# Altium PCB bootleg-1.PcbDoc (part 2 of 2)
Units mm, origin at the board's own origin, x right, y up, seen from the top; angles counter-clockwise.
Board outline 284.8 x 94.3 mm, 2 copper layers (Component Side, Bottom Layer), stack 1.571 mm thick; 153 components, 101 nets, 742 pads, 48 vias.
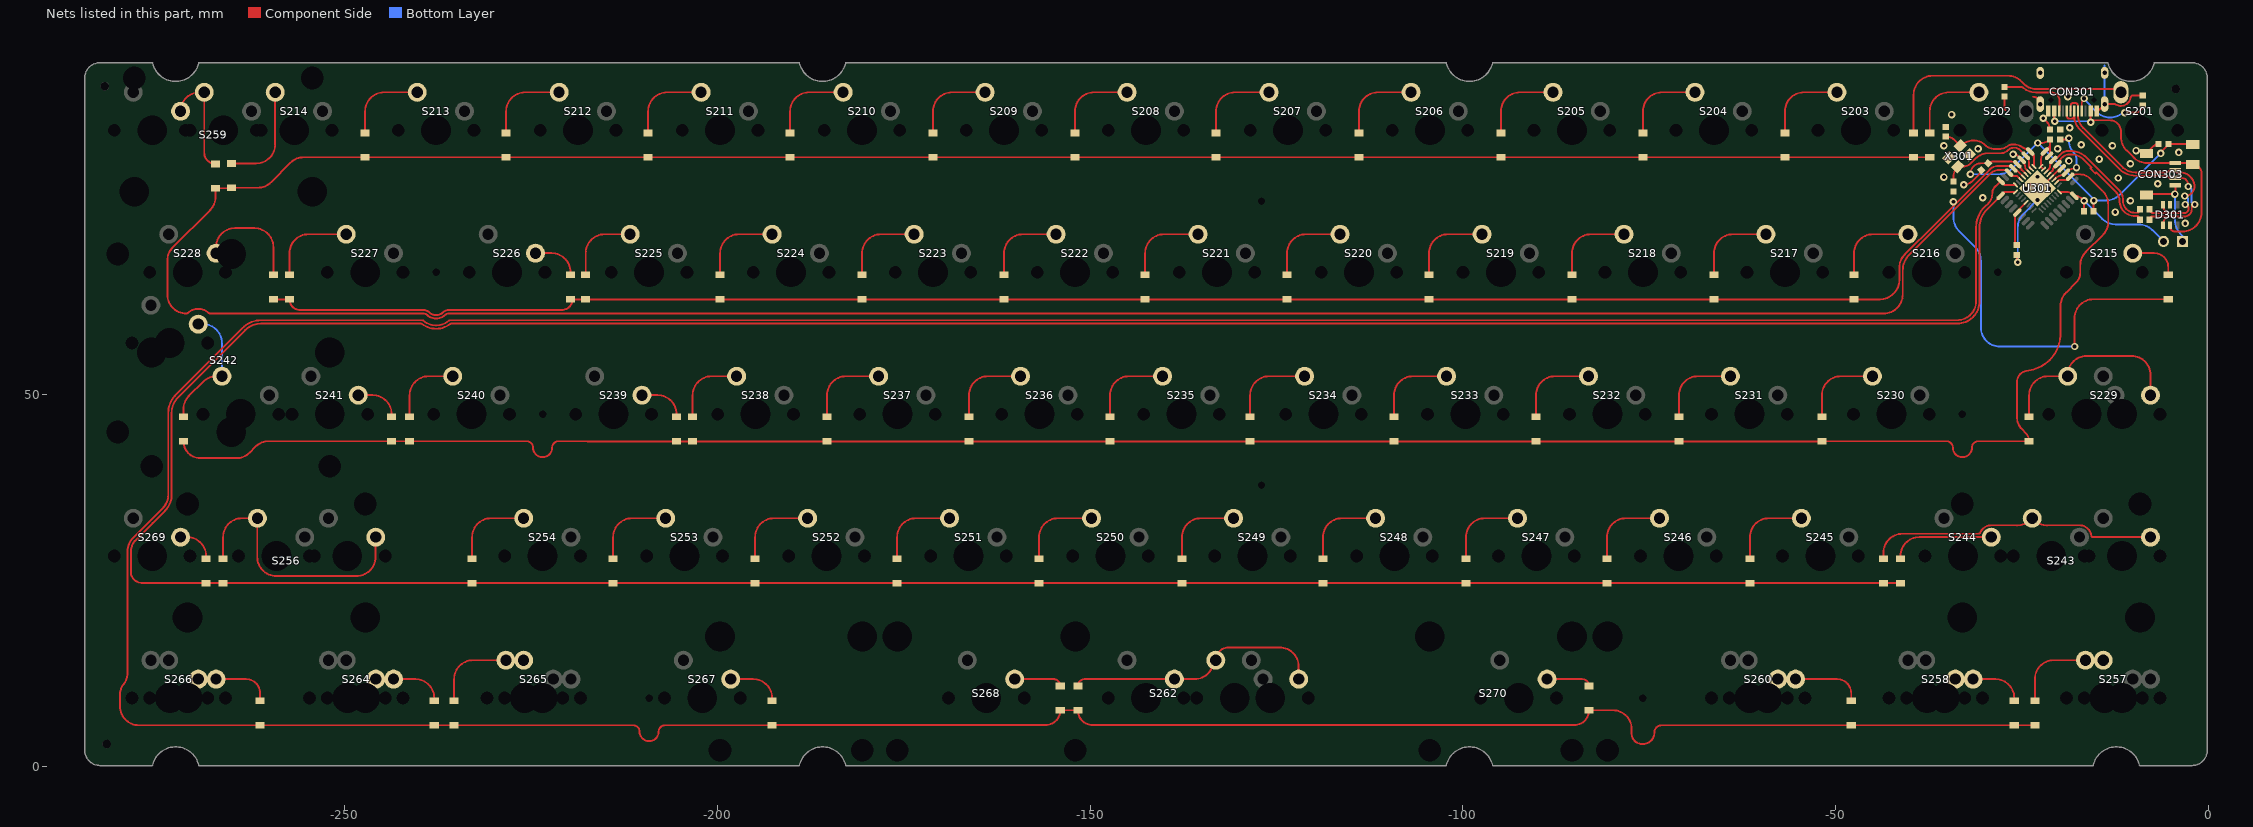
[diagram p2: the nets of this part, all layers, seen from the top]

## Via types
v1: diameter 1, hole 0.5, Component Side to Bottom Layer, tented both sides, 43 vias
v2: diameter 1, hole 0.5, Component Side to Bottom Layer, tented bottom, 5 vias

## Nets (pads, with @x,y where several pads share a name; then routed paths per layer and width w, separated by ;. In a path a pad name is that pad's centre, name@x,y a point inside that pad or via, vN(x,y) a via of type N, cw(c..) or ccw(c..) an arc to the next point about the centre after c; other vN are vias at no path point) (continued)
D_N: CON301.A7 CON301.B7 CON303.2 D301.3 R305.2 | length 34.6
  Component Side w0.254: CON301.A7@-18.45,88 ccw(c-18.681,88.106) -18.427,88.107 -18.427,88.725 cw(c-18.1,88.725) -18.1,89.052 -17.8,89.052 cw(c-17.8,88.725) -17.473,88.725 -17.473,88.106 ccw(c-17.219,88.106) CON301.B7@-17.45,88 ; CON301.B7@-17.45,87.381 ccw(c-15.108,87.381) -16.765,85.726 ccw(c-15.108,87.381) -16.764,85.725 -11.539,80.5 ccw(c-9.743,82.296) -9.743,79.756 -5.721,79.756 ccw(c-5.721,80.575) -5.142,79.996 -4.511,79.996 cw(c-4.511,79.725) -4.24,79.725 -3.702,79.725 cw(c-3.702,77.851) -1.829,77.851 cw(c-3.099,77.851) -3.099,76.581 v1(-3.137,76.581) v1@-3.175,76.581 ; R305.2@-7.859,74.803 ccw(c-7.351,74.803) -7.351,74.295 -5.084,74.295 ; D301.3@-6.03,75.241 ccw(c-5.084,75.241) -5.084,74.295 ; v1(-3.048,75.438) cw(c-3.048,75.032) -2.642,75.032 -2.642,74.803 cw(c-3.15,74.803) -3.15,74.295 -5.084,74.295
  Bottom Layer w0.254: v1(-3.137,76.581) cw(c-3.137,76.111) -2.667,76.111 v1@-2.667,75.692
D_P: CON301.A6 CON301.B6 CON303.3 D301.4 R306.2 | length 34.9
  Component Side w0.254: CON301.B6@-18.927,88.118 cw(c-18.669,88.229) CON301.B6@-18.931,88.128 ; R306.2@-7.859,73.406 cw(c-7.427,73.406) -7.427,73.838 -3.15,73.838 ccw(c-3.15,74.803) -2.184,74.803 -2.184,75.032 cw(c-1.778,75.032) v1(-1.778,75.438) ; D301.4@-6.03,72.841 cw(c-5.042,72.841) -5.042,73.829 -4.953,73.829 ; CON303.3@-4.511,78.996 -5.142,78.996 ccw(c-5.873,78.265) -5.873,79.299 -9.743,79.299 cw(c-9.743,82.296) -11.862,80.177 -17.206,85.52 cw(c-15.41,87.317) -17.95,87.317 CON301.A6@-17.95,88 ccw(c-17.719,87.894) -17.973,87.894 -17.973,87.275 cw(c-18.3,87.275) -18.3,86.948 -18.6,86.948 cw(c-18.6,87.275) -18.927,87.275 -18.927,88.081 ccw(c-19.181,88.082) CON301.B6@-18.931,88.128 ; CON303.3@-4.38,79.008 -3.621,79.008 cw(c-3.621,77.659) -3.043,78.878 cw(c-3.95,77.971) -2.667,77.971 v1(-2.667,77.851) ; CON301.B6@-18.931,88.128 ccw(c-19.181,88.082) -18.936,88.148 -18.941,88.169 cw(c-18.696,88.235) -18.95,88.229 ccw(c-18.669,88.229) CON301.B6@-18.931,88.128
  Bottom Layer w0.254: v1(-2.667,77.851) cw(c-2.667,77.394) -2.21,77.394 -2.21,75.692
D_PRE_N: R305.1 U301.30 | length 18.3
  Component Side w0.254: U301.30@-21.719,79.828 -21.336,80.211 ccw(c-21.644,80.518) -21.209,80.518 cw(c-20.107,80.518) -20.886,81.297 U301.30@-20.765,81.419 ccw(c-20.765,81.994) -20.358,81.587 -19.667,82.278 ; -19.665,82.276 cw(c-18.819,81.43) -18.819,82.626 -18.451,82.626 cw(c-18.451,79.629) -16.332,81.748 -11.906,77.323 cw(c-13.055,76.173) -11.43,76.173 -11.43,75.984 ccw(c-9.779,75.984) -9.779,74.333 -9.449,74.333 ccw(c-9.449,74.496) -9.286,74.496 cw(c-8.852,74.496) R305.1@-9.159,74.803
D_PRE_P: R306.1 U301.29 | length 18.2
  Component Side w0.254: U301.29@-21.366,79.474 -20.887,79.953 ccw(c-21.06,80.125) -20.816,80.125 cw(c-20.548,80.125) -20.738,80.314 U301.29@-20.199,80.853 cw(c-19.614,80.853) -20.028,81.267 -19.476,81.819 cw(c-18.63,80.973) -18.63,82.169 -18.451,82.169 cw(c-18.451,79.629) -16.655,81.425 -16.318,81.088 -15.643,80.413 -15.784,80.273 -15.109,79.598 -14.969,79.739 -13.843,78.613 -12.363,77.133 ; -12.362,77.132 cw(c-13.512,75.984) -11.887,75.984 ccw(c-9.779,75.984) -9.779,73.876 -9.449,73.876 cw(c-9.449,73.713) -9.286,73.713 ccw(c-8.852,73.713) R306.1@-9.159,73.406
GND: C301.1 C302.1 C303.1 C304.1 C305.1 C306.1 CON301.A1B12 CON301.B1A12 CON301.S1 CON302.1 CON303.4 CON303.5 D301.2 R302.2 R303.2 R304.2 U301.3 U301.28 X301.2 X301.4 | length 51.7
  Component Side w0.254: v1(-32.766,78.105) ccw(c-32.766,79.702) -31.637,78.573 -30.432,79.778 C302.1@-30.432,80.058 ; R303.2@-27.305,89.901 -27.305,88.265 ccw(c-27.178,88.265) -27.178,88.138 ; v1(-26.162,82.169) -25.758,82.169 U301.3@-25.007,81.419 -24.961,81.372 cw(c-26.047,80.286) -24.769,81.139 cw(c-26.047,80.286) -24.671,80.968 cw(c-26.047,80.286) -24.511,80.286 U301.3@-24.053,79.828 ; R302.2@-25.654,68.692 -25.654,67.998 ccw(c-25.22,67.998) v1(-25.527,67.691) ; -23.506,89.901 cw(c-23.506,88.915) CON301.S1@-22.52,88.915 ; v2(-22.886,77.6) -22.533,77.6 -19.845,80.287 U301.28@-19.633,80.287 ; v1(-22.098,86.995) -21.647,86.544 cw(c-22.706,85.486) C303.1@-21.209,85.486 ; CON301.A1B12@-14.95,88 ccw(c-14.95,88.374) -14.685,88.11 CON301.S1@-13.88,88.915 -12.54,88.915 cw(c-12.539,88.661) -12.402,88.875 ccw(c-11.69,89.995) -10.384,89.761 ccw(c-11.69,89.995) -10.375,89.818 cw(c-10.123,89.784) -10.34,89.917 cw(c-10.087,89.761) -10.087,90.058 R304.2@-8.763,90.058 ; CON303.5@-8.255,82.308 -7.264,83.299 cw(c-6.619,82.653) C304.1@-6.619,83.566 ; CON303.5@-7.948,76.835 v1(-4.445,76.835) ccw(c-4.602,76.992) -4.38,76.992 CON303.4@-4.38,78.008 ; v1@-6.858,77.925 ccw(c-7.165,78.232) v1(-6.731,78.232)
  Bottom Layer w0.254: v1(-25.527,67.691) -25.527,72.352 ; -25.527,72.39 -25.527,72.352 ; v2(-22.886,76.045) -24.783,74.148 ccw(c-22.987,72.352) -25.527,72.352 ; CON301.S1@-13.88,89.915 CON301.S1@-13.88,93.095 -13.88,94.095 ; v1(-4.445,76.835) -4.445,73.315 ccw(c-1.905,73.315) -3.701,71.519 CON302.1@-3.048,70.866
  other v1: -3.048,72.898 -12.446,74.422 -10.414,75.946 -30.226,76.327 -12.065,78.994 -35.433,79.121 -10.414,80.899 -18.669,81.28 -14.605,81.534 -3.937,82.423 -9.652,82.677 -30.861,82.931 -20.193,82.931 -35.433,83.312 -12.827,83.312 -17.018,83.439 -18.542,85.725 -34.417,87.503 -18.796,89.916
  other v2: -24.442,77.6 -21.33,77.6 -22.886,79.156
NetC301_2: C301.2 U301.27 | length 8.8
  Component Side w0.254: U301.27@-20.659,78.767 -20.501,78.925 cw(c-19.414,77.839) -19.414,79.375 U301.27@-19.068,79.722 cw(c-17.608,78.262) v1@-17.608,80.326 ; C301.2@-19.812,84.186 -18.796,84.186 v1@-18.796,84.201
  Bottom Layer w0.254: v1(-18.669,84.328) -18.669,83.956 ccw(c-16.501,83.956) -18.034,82.423 cw(c-18.954,81.503) -18.016,82.405 cw(c-18.954,81.503) -17.653,81.503 v1(-17.653,80.391)
NetC305_2: C305.2 U301.2 X301.3 | length 14.8
  Component Side w0.254: C305.2@-34.163,78.501 -34.163,79.123 cw(c-32.165,79.123) X301.3@-33.578,80.536 ; X301.3@-33.983,80.572 X301.3@-33.798,80.756 ; X301.3@-33.578,80.536 -32.818,80.536 ccw(c-32.818,81.867) -31.877,80.926 -31.226,81.577 cw(c-29.43,79.781) -29.43,82.321 -27.839,82.321 ccw(c-27.839,83.795) -26.797,82.753 cw(c-26.06,82.016) -26.06,83.058 cw(c-26.06,81.743) -25.13,82.673 U301.2@-24.442,81.984 cw(c-25.484,80.942) -24.01,80.942 -24.01,80.492 U301.2@-23.699,80.181
NetC306_2: C306.2 U301.1 X301.1 | length 16.3
  Component Side w0.254: C306.2@-35.179,84.567 cw(c-35.179,82.921) -34.015,84.085 X301.1@-33.224,83.294 cw(c-31.49,81.56) -31.49,84.012 -31.329,84.012 cw(c-31.329,82.056) -29.945,83.439 ccw(c-28.612,84.772) -29.944,83.438 ccw(c-28.612,84.772) -28.612,82.887 -28.023,82.887 ccw(c-28.023,84.621) -27.299,83.045 -27.095,83.156 -26.775,83.33 cw(c-26.06,82.016) -26.06,83.512 cw(c-26.06,81.743) -25.196,83.286 U301.1@-23.876,82.55 ; U301.1@-23.346,80.535 -23.346,81.27 ; U301.1@-23.876,82.55 cw(c-25.156,81.27) -23.346,81.27 ; U301.1@-23.876,82.55 -23.346,82.02 -23.346,81.27
NetCON301_A5: CON301.A5 R304.1 | length 11.8
  Component Side w0.254: CON301.A5@-16.95,88 -16.95,88.968 cw(c-16.256,88.968) v1@-16.256,89.662 ; v1(-11.176,87.757) -9.764,87.757 ccw(c-9.764,88.758) R304.1@-8.763,88.758
  Bottom Layer w0.254: v1(-16.637,89.662) -16.637,89.535 -14.968,87.866 ccw(c-13.172,89.662) -14.848,87.753 ccw(c-13.172,89.662) -13.172,87.122 -13.117,87.122 ccw(c-13.117,89.662) -11.321,87.866 -11.285,87.866 v1(-11.176,87.757)
NetCON301_B5: CON301.B5 R303.1 | length 9.6
  Component Side w0.254: R303.1@-27.305,91.201 -25.013,91.201 cw(c-25.012,90.947) -24.843,91.137 ccw(c-23.105,93.1) -23.115,90.478 -23.105,90.478 -21.003,90.478 cw(c-21.009,89.408) -19.939,89.408 -19.939,88 CON301.B5@-19.95,88
NetD201_1: D201.1 S201.1 | length 35.2
  Component Side w0.254: D201.1@-39.497,85.05 -39.497,90.177 cw(c-36.957,90.177) -36.957,92.717 -26.84,92.717 cw(c-26.84,90.177) -25.044,91.973 -24.638,91.567 ccw(c-23.105,93.1) -23.105,90.932 -12.127,90.932 cw(c-12.127,90.495) S201.1@-11.69,90.495
NetD202_1: D202.1 S202.1 | length 11
  Component Side w0.254: D202.1@-37.338,85.05 -37.338,87.955 cw(c-34.798,87.955) -34.798,90.495 S202.1@-30.74,90.495
NetD203_1: D203.1 S203.1 | length 11.3
  Component Side w0.254: D203.1@-56.769,85.05 -56.769,87.955 cw(c-54.229,87.955) -54.229,90.495 S203.1@-49.79,90.495
NetD204_1: D204.1 S204.1 | length 11.3
  Component Side w0.254: D204.1@-75.819,85.05 -75.819,87.955 cw(c-73.279,87.955) -73.279,90.495 S204.1@-68.84,90.495
NetD205_1: D205.1 S205.1 | length 11.3
  Component Side w0.254: D205.1@-94.869,85.05 -94.869,87.955 cw(c-92.329,87.955) -92.329,90.495 S205.1@-87.89,90.495
NetD206_1: D206.1 S206.1 | length 11.3
  Component Side w0.254: D206.1@-113.919,85.05 -113.919,87.955 cw(c-111.379,87.955) -111.379,90.495 S206.1@-106.94,90.495
NetD207_1: D207.1 S207.1 | length 11.5
  Component Side w0.254: D207.1@-133.096,85.05 -133.096,87.955 cw(c-130.556,87.955) -130.556,90.495 S207.1@-125.99,90.495
NetD208_1: D208.1 S208.1 | length 11.3
  Component Side w0.254: D208.1@-152.019,85.05 -152.019,87.955 cw(c-149.479,87.955) -149.479,90.495 S208.1@-145.04,90.495
NetD209_1: D209.1 S209.1 | length 11.3
  Component Side w0.254: D209.1@-171.069,85.05 -171.069,87.955 cw(c-168.529,87.955) -168.529,90.495 S209.1@-164.09,90.495
NetD210_1: D210.1 S210.1 | length 11.5
  Component Side w0.254: D210.1@-190.246,85.05 -190.246,87.955 cw(c-187.706,87.955) -187.706,90.495 S210.1@-183.14,90.495
NetD211_1: D211.1 S211.1 | length 11.5
  Component Side w0.254: D211.1@-209.296,85.05 -209.296,87.955 cw(c-206.756,87.955) -206.756,90.495 S211.1@-202.19,90.495
NetD212_1: D212.1 S212.1 | length 11.5
  Component Side w0.254: D212.1@-228.346,85.05 -228.346,87.955 cw(c-225.806,87.955) -225.806,90.495 S212.1@-221.24,90.495
NetD213_1: D213.1 S213.1 | length 11.3
  Component Side w0.254: D213.1@-247.269,85.05 -247.269,87.955 cw(c-244.729,87.955) -244.729,90.495 S213.1@-240.29,90.495
NetD214_1: D214.1 S214.1 | length 14.3
  Component Side w0.254: D214.1@-265.176,80.954 -261.88,80.954 ccw(c-261.88,83.494) -259.34,83.494 S214.1@-259.34,90.495
NetD215_1: D215.1 S215.1 | length 6.9
  Component Side w0.254: S215.1@-10.102,68.905 -7.224,68.905 cw(c-7.224,67.015) -5.334,67.015 D215.1@-5.334,66
NetD216_1: D216.1 S216.1 | length 11.6
  Component Side w0.254: D216.1@-47.498,66 -47.498,68.905 cw(c-44.958,68.905) -44.958,71.445 S216.1@-40.265,71.445
NetD217_1: D217.1 S217.1 | length 11.3
  Component Side w0.254: D217.1@-66.294,66 -66.294,68.905 cw(c-63.754,68.905) -63.754,71.445 S217.1@-59.315,71.445
NetD218_1: D218.1 S218.1 | length 11.3
  Component Side w0.254: D218.1@-85.344,66 -85.344,68.905 cw(c-82.804,68.905) -82.804,71.445 S218.1@-78.365,71.445
NetD219_1: D219.1 S219.1 | length 11.5
  Component Side w0.254: D219.1@-104.521,66 -104.521,68.905 cw(c-101.981,68.905) -101.981,71.445 S219.1@-97.415,71.445
NetD220_1: D220.1 S220.1 | length 12.2
  Component Side w0.254: D220.1@-123.571,66 -123.571,68.905 cw(c-121.031,68.905) -121.031,71.445 S220.1@-116.465,71.445 S220.1@-116.967,70.943
NetD221_1: D221.1 S221.1 | length 11.5
  Component Side w0.254: D221.1@-142.621,66 -142.621,68.905 cw(c-140.081,68.905) -140.081,71.445 S221.1@-135.515,71.445
NetD222_1: D222.1 S222.1 | length 11.3
  Component Side w0.254: D222.1@-161.544,66 -161.544,68.905 cw(c-159.004,68.905) -159.004,71.445 S222.1@-154.565,71.445
NetD223_1: D223.1 S223.1 | length 11.3
  Component Side w0.254: D223.1@-180.594,66 -180.594,68.905 cw(c-178.054,68.905) -178.054,71.445 S223.1@-173.615,71.445
NetD224_1: D224.1 S224.1 | length 11.3
  Component Side w0.254: D224.1@-199.644,66 -199.644,68.905 cw(c-197.104,68.905) -197.104,71.445 S224.1@-192.665,71.445
NetD225_1: D225.1 S225.1 | length 10.3
  Component Side w0.254: D225.1@-217.678,66 -217.678,68.905 cw(c-215.138,68.905) -215.138,71.445 S225.1@-211.715,71.445
NetD226_1: D226.1 S226.1 | length 6.5
  Component Side w0.254: S226.1@-224.415,68.905 -222.25,68.905 cw(c-222.25,66.365) -219.71,66.365 D226.1@-219.71,66
NetD227_1: D227.1 S227.1 | length 12.7
  Component Side w0.254: D227.1@-257.429,66 -257.429,68.905 cw(c-254.889,68.905) -254.889,71.445 S227.1@-249.815,71.445 S227.1@-250.317,70.943
NetD228_1: D228.1 S228.1 | length 15.8
  Component Side w0.254: S228.1@-267.277,68.905 -267.277,69.723 cw(c-264.737,69.723) -264.737,72.263 -262.128,72.263 cw(c-262.128,69.723) -259.588,69.723 D228.1@-259.588,66
  Bottom Layer w0.254: S228.1@-267.734,68.448 S228.1@-267.277,68.905
NetD229_1: D229.1 S229.1 | length 26.4
  Component Side w0.254: D229.1@-24.003,46.95 -24.003,49.855 cw(c-21.463,49.855) -21.463,52.395 S229.1@-18.834,52.395 -18.834,52.578 cw(c-16.294,52.578) -16.294,55.118 -10.261,55.118 cw(c-10.261,52.578) -7.721,52.578 S229.1@-7.721,49.855
NetD230_1: D230.1 S230.1 | length 11.1
  Component Side w0.254: D230.1@-51.816,46.95 -51.816,49.855 cw(c-49.276,49.855) -49.276,52.395 S230.1@-45.027,52.395
NetD231_1: D231.1 S231.1 | length 11.3
  Component Side w0.254: D231.1@-70.993,46.95 -70.993,49.855 cw(c-68.453,49.855) -68.453,52.395 S231.1@-64.077,52.395
NetD232_1: D232.1 S232.1 | length 11.4
  Component Side w0.254: D232.1@-90.17,46.95 -90.17,49.855 cw(c-87.63,49.855) -87.63,52.395 S232.1@-83.127,52.395
NetD233_1: D233.1 S233.1 | length 11.4
  Component Side w0.254: D233.1@-109.22,46.95 -109.22,49.855 cw(c-106.68,49.855) -106.68,52.395 S233.1@-102.177,52.395
NetD234_1: D234.1 S234.1 | length 12.5
  Component Side w0.254: D234.1@-128.524,46.95 -128.524,49.855 cw(c-125.984,49.855) -125.984,52.395 S234.1@-121.227,52.395
  Bottom Layer w0.254: S234.1@-121.793,51.83 S234.1@-121.227,52.395
NetD235_1: D235.1 S235.1 | length 11.4
  Component Side w0.254: D235.1@-147.32,46.95 -147.32,49.855 cw(c-144.78,49.855) -144.78,52.395 S235.1@-140.277,52.395
NetD236_1: D236.1 S236.1 | length 11.3
  Component Side w0.254: D236.1@-166.243,46.95 -166.243,49.855 cw(c-163.703,49.855) -163.703,52.395 S236.1@-159.327,52.395
NetD237_1: D237.1 S237.1 | length 11.3
  Component Side w0.254: D237.1@-185.293,46.95 -185.293,49.855 cw(c-182.753,49.855) -182.753,52.395 S237.1@-178.377,52.395
NetD238_1: D238.1 S238.1 | length 10.3
  Component Side w0.254: D238.1@-203.327,46.95 -203.327,49.855 cw(c-200.787,49.855) -200.787,52.395 S238.1@-197.427,52.395
NetD239_1: D239.1 S239.1 | length 6.5
  Component Side w0.254: S239.1@-210.127,49.855 -208.026,49.855 cw(c-208.026,47.315) -205.486,47.315 D239.1@-205.486,46.95
NetD240_1: D240.1 S240.1 | length 10.1
  Component Side w0.254: D240.1@-241.3,46.95 -241.3,49.855 cw(c-238.76,49.855) -238.76,52.395 S240.1@-235.527,52.395
NetD241_1: D241.1 S241.1 | length 6.3
  Component Side w0.254: S241.1@-248.202,49.855 -246.253,49.855 cw(c-246.253,47.315) -243.713,47.315 D241.1@-243.713,46.95
NetD242_1: D242.1 S242.1 | length 17.5
  Component Side w0.254: D242.1@-271.653,46.95 -271.653,47.963 cw(c-269.113,47.963) -270.909,49.759 -269.017,51.651 cw(c-267.221,49.855) -267.221,52.395 S242.1@-266.49,52.395
  Bottom Layer w0.254: S242.1@-269.67,59.385 -269.03,59.385 cw(c-269.03,56.845) -266.49,56.845 S242.1@-266.49,52.395
NetD243_1: D243.1 S243.1 | length 40.1
  Component Side w0.254: D243.1@-43.561,27.9 -43.561,28.719 cw(c-41.021,28.719) -41.021,31.259 -33.782,31.259 -30.793,31.259 ccw(c-30.793,31.513) -30.559,31.416 cw(c-29.083,30.805) -29.238,32.394 ; -29.337,32.385 -29.238,32.394 ; -29.073,32.402 ccw(c-29.083,30.805) -29.238,32.394 ; -29.073,32.402 -25.61,32.385 ; -25.608,32.385 ccw(c-25.608,34.925) -23.812,33.129 S243.1@-23.596,33.345 -23.383,33.132 ccw(c-21.587,34.928) -23.38,33.129 ccw(c-21.587,34.928) -21.587,32.388 ; -21.586,32.388 -17.255,32.402 -17.254,32.402 cw(c-17.246,30.805) -17.035,32.388 ; -17.035,32.388 cw(c-17.246,30.805) -15.664,31.024 ccw(c-15.413,31.059) -15.413,30.805 S243.1@-7.721,30.805
NetD244_1: D244.1 S244.1 | length 14
  Component Side w0.254: D244.1@-41.275,27.9 -41.275,28.265 cw(c-38.735,28.265) -38.735,30.805 S244.1@-29.083,30.805
NetD245_1: D245.1 S245.1 | length 11.3
  Component Side w0.254: D245.1@-61.468,27.9 -61.468,30.805 cw(c-58.928,30.805) -58.928,33.345 S245.1@-54.552,33.345
NetD246_1: D246.1 S246.1 | length 12.4
  Component Side w0.254: D246.1@-80.645,27.9 -80.645,30.805 cw(c-78.105,30.805) -78.105,33.345 S246.1@-73.602,33.345 S246.1@-74.295,32.652
NetD247_1: D247.1 S247.1 | length 11.3
  Component Side w0.254: D247.1@-99.568,27.9 -99.568,30.805 cw(c-97.028,30.805) -97.028,33.345 S247.1@-92.652,33.345
NetD248_1: D248.1 S248.1 | length 11.4
  Component Side w0.254: D248.1@-118.745,27.9 -118.745,30.805 cw(c-116.205,30.805) -116.205,33.345 S248.1@-111.702,33.345
NetD249_1: D249.1 S249.1 | length 11.3
  Component Side w0.254: D249.1@-137.668,27.9 -137.668,30.805 cw(c-135.128,30.805) -135.128,33.345 S249.1@-130.752,33.345
NetD250_1: D250.1 S250.1 | length 11.4
  Component Side w0.254: D250.1@-156.845,27.9 -156.845,30.805 cw(c-154.305,30.805) -154.305,33.345 S250.1@-149.802,33.345
NetD251_1: D251.1 S251.1 | length 11.4
  Component Side w0.254: D251.1@-175.895,27.9 -175.895,30.805 cw(c-173.355,30.805) -173.355,33.345 S251.1@-168.852,33.345
NetD252_1: D252.1 S252.1 | length 11.4
  Component Side w0.254: D252.1@-194.945,27.9 -194.945,30.805 cw(c-192.405,30.805) -192.405,33.345 S252.1@-187.902,33.345
NetD253_1: D253.1 S253.1 | length 11.4
  Component Side w0.254: D253.1@-213.995,27.9 -213.995,30.805 cw(c-211.455,30.805) -211.455,33.345 S253.1@-206.952,33.345
NetD254_1: D254.1 S254.1 | length 11.3
  Component Side w0.254: D254.1@-232.918,27.9 -232.918,30.805 cw(c-230.378,30.805) -230.378,33.345 S254.1@-226.002,33.345
NetD256_1: D256.1 S256.1 | length 36.3
  Component Side w0.254: D256.1@-266.327,27.9 -266.327,30.805 cw(c-263.787,30.805) -263.787,33.345 -261.747,33.345 -261.747,28.14 ccw(c-259.207,28.14) -259.207,25.6 -248.412,25.6 ccw(c-248.412,28.14) -248.061,25.624 ccw(c-248.412,28.14) -245.872,28.14 -245.872,30.805 S256.1@-246.38,30.297
NetD257_1: D257.1 S257.2 | length 11.1
  Component Side w0.254: D257.1@-23.241,8.85 -23.241,11.755 cw(c-20.701,11.755) -20.701,14.295 S257.2@-16.452,14.295
NetD258_1: D258.1 S258.1 | length 9.7
  Component Side w0.254: S258.1@-33.909,11.755 S258.1@-31.528,11.755 -28.54,11.755 cw(c-28.54,9.215) -26,9.215 D258.1@-26,8.85
NetD259_1: D259.1 S259.1 | length 16.1
  Component Side w0.254: S259.1@-272.034,87.955 cw(c-269.494,87.955) -269.494,90.495 S259.1@-268.859,90.495 -268.859,82.407 ccw(c-267.335,82.407) D259.1@-267.335,80.883
  Bottom Layer w0.254: S259.1@-272.04,87.955 S259.1@-271.349,88.646
NetD260_1: D260.1 S260.1 | length 9.6
  Component Side w0.254: S260.1@-55.346,11.755 -49.769,11.755 cw(c-49.769,9.865) -47.879,9.865 D260.1@-47.879,8.85
NetD262_1: D262.1 S262.1 | length 35.8
  Component Side w0.254: D262.1@-151.638,10.85 cw(c-150.733,10.85) -150.733,11.755 S262.1@-138.689,11.755 -135.983,11.755 ccw(c-135.983,14.295) -133.443,14.295 S262.1@-133.443,14.732 ; S262.1@-133.133,14.295 cw(c-131.426,14.295) -131.426,16.002 -124.553,16.002 cw(c-124.553,13.462) -122.013,13.462 S262.1@-122.013,11.755
NetD264_1: D264.1 S264.1 | length 7.3
  Component Side w0.254: S264.1@-243.459,11.755 -240.54,11.755 cw(c-240.54,9.215) -238,9.215 D264.1@-238,8.85
NetD265_1: D265.1 S265.2 | length 11.3
  Component Side w0.254: D265.1@-235.331,8.85 -235.331,11.755 cw(c-232.791,11.755) -232.791,14.295 S265.2@-228.383,14.295
NetD266_1: D266.1 S266.1 | length 8
  Component Side w0.254: S266.1@-267.277,11.755 -263.256,11.755 cw(c-263.256,9.865) -261.366,9.865 D266.1@-261.366,8.85
NetD267_1: D267.1 S267.1 | length 7.4
  Component Side w0.254: S267.1@-198.221,11.755 -195.199,11.755 cw(c-195.199,9.215) -192.659,9.215 D267.1@-192.659,8.85
NetD268_1: D268.1 S268.1 | length 6.6
  Component Side w0.254: S268.1@-160.121,11.755 -154.905,11.755 cw(c-154.905,10.85) -154.584,11.696 cw(c-154.905,10.85) D268.1@-154,10.85
NetD269_1: D269.1 S269.1 | length 5.2
  Component Side w0.254: S269.1@-272.04,30.805 -271.145,30.805 cw(c-271.145,28.265) -268.605,28.265 D269.1@-268.605,27.9
NetD270_1: D270.1 S270.1 | length 6.1
  Component Side w0.254: S270.1@-88.683,11.755 -83.963,11.755 cw(c-83.963,10.85) D270.1@-83.058,10.85
NetR302_1: R302.1 U301.13 | length 6.4
  Component Side w0.254: R302.1@-25.654,69.992 cw(c-25.036,70.61) -25.91,70.61 -25.91,74.011 U301.13@-25.573,74.348 -25.573,74.503 cw(c-25.436,74.503) -25.533,74.6 U301.13@-24.406,75.726
PC2: D215.2 D216.2 D217.2 D218.2 D219.2 D220.2 D221.2 D222.2 D223.2 D224.2 D225.2 D226.2 D227.2 D228.2 U301.5 | length 296.1
  Component Side w0.254: D228.2@-259.588,62.715 D227.2@-257.683,62.715 ; D227.2@-257.429,62.73 ccw(c-255.973,62.73) -255.973,61.274 -239.431,61.274 cw(c-239.431,60.161) -238.655,60.958 ; -238.645,60.948 ccw(c-239.431,60.161) -238.655,60.958 ; U301.5@-26.419,80.624 -28.102,80.624 ccw(c-28.102,78.932) -29.298,80.128 -36.631,72.795 ; U301.5@-26.139,80.287 -25.927,80.287 U301.5@-24.76,79.121 ; v1(-17.907,56.388) -17.907,60.19 cw(c-15.367,60.19) -15.367,62.73 D215.2@-5.334,62.73 ; -238.655,60.958 ccw(c-237.75,61.865) -236.844,60.959 cw(c-236.077,60.182) -236.077,61.274 -220.897,61.274 ccw(c-220.897,62.715) -219.456,62.715 -44.015,62.715 ccw(c-44.015,65.255) -42.219,63.459 -42.165,63.513 ccw(c-43.961,65.309) -41.421,65.309 -41.421,66.953 cw(c-38.881,66.953) -40.677,68.749 -36.633,72.794 ; -36.633,72.794 cw(c-35.845,72.009) -36.631,72.795 ; -36.633,72.794 -36.631,72.795
  Bottom Layer w0.254: v1(-34.163,75.819) -34.163,73.696 ccw(c-31.623,73.696) -33.419,71.9 -31.224,69.705 cw(c-33.02,67.909) -30.48,67.909 -30.48,58.928 ccw(c-27.94,58.928) -27.94,56.388 v1(-17.907,56.388)
PC4: D229.2 D230.2 D231.2 D232.2 D233.2 D234.2 D235.2 D236.2 D237.2 D238.2 D239.2 D240.2 D241.2 D242.2 U301.26 | length 301.1
  Component Side w0.254: D242.2@-271.653,43.68 ccw(c-269.375,43.68) -269.375,41.402 -264.577,41.402 ccw(c-264.577,43.942) -262.781,42.146 -261.991,42.936 cw(c-260.195,41.14) -260.195,43.68 D241.2@-243.713,43.68 ; D241.2@-243.459,43.68 D240.2@-241.3,43.68 -225.608,43.68 cw(c-225.608,42.815) -224.743,42.815 ccw(c-223.462,42.815) -222.181,42.815 cw(c-221.316,42.815) -221.316,43.68 -217.424,43.68 -217.424,43.665 D230.2@-51.816,43.665 ; D230.2@-51.816,43.68 -35.108,43.68 cw(c-35.108,42.815) -34.243,42.815 ccw(c-32.962,42.815) -31.681,42.815 cw(c-30.816,42.815) -30.816,43.68 D229.2@-24.225,43.68 ; -24.405,53.119 ccw(c-24.384,52.866) -24.444,53.113 ccw(c-24.064,51.569) -25.654,51.569 -25.654,46.99 ccw(c-23.201,46.99) -24.936,45.256 -24.458,44.778 cw(c-25.555,43.68) D229.2@-24.003,43.68 D229.2@-24.003,43.665 ; -24.405,53.119 ccw(c-24.816,58.125) -24.064,53.159 ccw(c-24.816,58.125) -22.737,53.552 ccw(c-24.816,58.125) -21.024,54.83 ccw(c-24.816,58.125) -19.984,56.752 -19.894,57.07 -19.846,57.398 ccw(c-24.816,58.125) -19.793,58.125 -19.793,61.832 cw(c-17.253,61.832) -19.049,63.628 -17.684,64.993 ccw(c-18.985,66.294) -17.145,66.294 -17.145,67.274 cw(c-14.605,67.274) -16.401,69.07 -14.128,71.343 ccw(c-15.924,73.139) -13.384,73.139 -13.384,74.734 ; U301.26@-20.305,78.413 -19.979,78.74 -18.918,78.74 U301.26@-18.502,79.156 cw(c-17.689,78.343) -17.689,79.493 -17.272,79.493 cw(c-17.272,77.324) -15.739,78.858 -14.195,77.314 cw(c-16.14,75.369) -13.389,75.369 -13.389,74.734
PD0: D201.2 D202.2 D203.2 D204.2 D205.2 D206.2 D207.2 D208.2 D209.2 D210.2 D211.2 D212.2 D213.2 D214.2 D259.2 U301.6 | length 510.3
  Component Side w0.254: -43.561,60.82 -236.047,60.82 ccw(c-236.048,60.112) -236.54,60.622 cw(c-237.75,61.865) -238.958,60.62 ccw(c-239.452,60.112) -239.453,60.82 -265.684,60.82 -268.101,60.82 cw(c-268.101,61.074) -268.274,60.888 ccw(c-269.67,59.385) -271.066,60.888 cw(c-271.239,61.074) -271.239,60.82 -271.272,60.82 cw(c-271.272,63.36) -273.812,63.36 -273.812,67.909 cw(c-271.272,67.909) -273.068,69.705 -268.079,74.694 ccw(c-269.875,76.49) -267.335,76.49 D259.2@-267.335,77.613 -265.247,77.613 ccw(c-265.247,77.684) D214.2@-265.176,77.684 -261.696,77.684 ccw(c-261.696,80.224) -259.9,78.428 -257.292,81.036 cw(c-255.496,79.24) -255.496,81.78 D213.2@-247.269,81.78 D212.2@-228.346,81.78 D211.2@-209.296,81.78 D210.2@-190.246,81.78 D209.2@-171.069,81.78 D208.2@-152.019,81.78 D207.2@-133.096,81.78 D206.2@-113.919,81.78 D205.2@-94.869,81.78 D204.2@-75.819,81.78 D203.2@-56.769,81.78 D201.2@-39.497,81.78 D202.2@-37.338,81.78 ; -43.507,60.82 ccw(c-43.507,63.36) -40.967,63.36 -40.967,66.577 cw(c-37.973,66.577) -40.091,68.694 ; -40.09,68.694 -36.311,72.473 cw(c-35.845,72.009) -36.31,72.474 -29.183,79.602 cw(c-28.08,78.499) -28.08,80.058 -27.041,80.058 U301.6@-26.704,79.722 -26.231,79.248 -25.594,79.248 U301.6@-25.113,78.767
PD2: D257.2 D258.2 D260.2 D262.2 D264.2 D265.2 D266.2 D267.2 D268.2 D270.2 U301.8 | length 579.6
  Component Side w0.254: D267.2@-192.659,5.565 -207.038,5.565 ccw(c-207.038,4.715) -207.888,4.715 cw(c-209.169,4.715) -210.45,4.715 ccw(c-211.3,4.715) -211.3,5.565 -277.622,5.565 cw(c-277.622,8.105) -280.162,8.105 -280.162,9.727 cw(c-277.945,9.727) -279.861,10.843 ccw(c-281.686,12.609) -279.513,11.294 ccw(c-281.686,12.609) -279.146,12.609 -279.146,28.92 cw(c-276.606,28.92) -278.402,30.716 -274.429,34.689 ccw(c-276.225,36.485) -273.685,36.485 -273.685,47.481 cw(c-270.237,47.481) -273.261,49.138 cw(c-270.237,47.481) -272.675,49.919 -270.2,52.395 -263.694,58.9 cw(c-261.254,56.464) -263.33,59.217 cw(c-261.254,56.464) -261.254,59.912 -241.935,59.912 -241.931,59.912 -240.837,59.912 ccw(c-240.833,60.366) -240.833,59.912 -239.628,59.912 cw(c-239.627,59.658) -239.462,59.851 ccw(c-237.75,61.865) -236.038,59.851 cw(c-235.873,59.658) -235.872,59.912 -234.061,59.912 -33.655,59.912 ccw(c-33.655,62.452) -31.115,62.452 -31.115,72.357 cw(c-27.213,72.357) -29.973,75.115 cw(c-27.213,72.357) -29.972,75.116 -29.453,75.635 ccw(c-30.653,76.835) -28.956,76.835 cw(c-27.423,76.835) -28.507,77.919 U301.8@-27.836,78.59 -27.305,78.06 U301.8@-25.821,78.06 ; D267.2@-192.659,5.58 -156,5.58 ccw(c-156,7.58) D268.2@-154,7.58 D262.2@-151.638,7.58 ccw(c-149.646,7.58) -149.646,5.588 -85.05,5.588 ccw(c-85.05,7.58) D270.2@-83.058,7.58 -79.843,7.58 cw(c-79.843,5.08) -77.343,5.08 -77.343,4.445 ccw(c-75.946,4.445) -77.16,3.754 ccw(c-75.946,4.445) -75.946,3.048 -75.819,3.048 ccw(c-75.819,4.572) -74.295,4.572 cw(c-73.302,4.572) -73.302,5.565 D257.2@-23.241,5.565
PD3: D243.2 D244.2 D245.2 D246.2 D247.2 D248.2 D249.2 D250.2 D251.2 D252.2 D253.2 D254.2 D256.2 D269.2 U301.9 | length 529.1
  Component Side w0.254: D244.2@-41.275,24.63 D243.2@-43.561,24.63 D245.2@-61.468,24.63 D246.2@-80.645,24.63 D247.2@-99.568,24.63 D248.2@-118.745,24.63 D249.2@-137.668,24.63 D250.2@-156.845,24.63 D251.2@-175.895,24.63 D252.2@-194.945,24.63 D253.2@-213.995,24.63 D254.2@-232.918,24.63 D256.2@-266.327,24.63 D269.2@-268.605,24.63 -277.106,24.63 cw(c-277.106,26.289) -278.679,25.762 cw(c-278.438,25.842) -278.692,25.842 -278.692,26.289 -278.692,28.92 cw(c-276.606,28.92) -278.23,30.229 cw(c-276.606,28.92) -278.082,30.394 -275.777,32.699 -274.109,34.367 ccw(c-276.225,36.485) -273.322,35.754 ccw(c-276.225,36.485) -273.231,36.485 -273.231,47.481 cw(c-270.237,47.481) -272.702,49.18 cw(c-270.237,47.481) -272.353,49.599 -263.372,58.58 cw(c-261.254,56.464) -263.057,58.854 cw(c-261.254,56.464) -261.254,59.458 -242.316,59.458 -242.312,59.458 -240.838,59.458 -240.833,59.458 -239.788,59.458 cw(c-239.787,59.204) -239.632,59.406 ccw(c-237.75,61.865) -235.868,59.406 cw(c-235.713,59.204) -235.712,59.458 -233.807,59.458 -33.655,59.458 ccw(c-33.655,62.452) -30.661,62.452 -30.661,72.357 cw(c-27.213,72.357) -29.651,74.795 -27.305,77.141 U301.9@-25.821,77.141
RAW: CON301.A4B9 CON301.B4A9 CON303.1 D301.5 F301.2 | length 38.5
  Component Side w0.254: CON301.B4A9@-20.65,88 -20.65,86.797 ccw(c-20.391,86.797) v1(-20.574,86.614) ; CON301.A4B9@-15.75,88 -15.748,88 v1(-15.748,86.487) cw(c-15.494,86.487) -15.494,86.741 -13.208,86.741 cw(c-13.208,85.217) -11.684,85.217 -11.684,84.491 ccw(c-9.144,84.491) -10.94,82.695 -9.997,81.752 ccw(c-8.201,83.548) -8.201,81.008 CON303.1@-4.38,81.008 -2.488,81.008 cw(c-2.488,80.363) F301.2@-2.032,80.819 cw(c-2.032,79.676) -0.889,79.676 -0.889,74.362 cw(c-3.429,74.362) -3.429,71.822 -4.473,71.822 cw(c-4.473,72.429) -5.08,72.429 D301.5@-5.08,72.666
  Bottom Layer w0.254: v1(-20.574,86.614) -15.875,86.614 cw(c-15.875,86.487) v1(-15.748,86.487)
RST: CON302.2 R301.2 U301.24 | length 17.8
  Component Side w0.254: U301.24@-19.952,77.141 -19.217,77.141 cw(c-19.217,75.33) U301.24@-17.936,76.61 ; U301.24@-17.936,76.61 cw(c-17.936,75.077) -16.852,76.161 v1(-16.637,75.946) -16.637,74.585 cw(c-16.688,74.585) R301.2@-16.652,74.549
  Bottom Layer w0.254: v1(-16.637,75.946) -14.206,73.515 ccw(c-12.41,75.311) -12.41,72.771 -9.307,72.771 cw(c-9.307,70.231) -7.511,72.027 CON302.2@-5.969,70.485
VCC: C302.2 C303.2 C304.2 F301.1 R301.1 U301.4 U301.31 U301.32 | length 56.2
  Component Side w0.254: v1(-31.877,79.502) -31.877,79.598 cw(c-30.576,79.598) -31.496,80.518 cw(c-30.386,79.408) -30.386,80.978 C302.2@-29.512,80.978 cw(c-29,80.465) -29,81.19 -26.386,81.19 cw(c-26.386,80.04) U301.4@-25.573,80.853 ; U301.4@-25.573,80.853 -25.573,80.706 -25.019,80.152 -25.019,80.087 U301.4@-24.406,79.474 ; v1(-22.86,83.693) -22.399,83.693 ccw(c-22.399,85.376) C303.2@-21.209,84.186 -21.209,83.237 ; U301.31@-22.073,80.181 U301.32@-22.426,80.535 -22.426,81.27 cw(c-20.616,81.27) U301.32@-21.896,82.55 ; U301.32@-21.896,82.55 -21.209,83.237 ; U301.31@-21.33,81.984 -21.209,82.106 -21.209,82.55 -21.209,83.237 ; R301.1@-15.352,74.549 v1(-15.352,75.961) v1@-15.24,76.073 ; v1@-6.35,82.423 -5.398,83.375 ccw(c-5.589,83.566) C304.2@-5.319,83.566 -2.145,83.566 cw(c-2.145,83.406) F301.1@-2.032,83.519
  Bottom Layer w0.254: v1(-31.877,79.502) -28.103,79.502 ccw(c-28.103,82.042) -26.307,80.246 v1(-22.86,83.693) -15.51,76.343 cw(c-15.893,75.961) v1(-15.352,75.961) -13.737,75.961 ccw(c-13.737,78.501) -11.941,76.705 v1(-6.35,82.296)
pads on no net: CON301. CON301.A8 CON301.B8 D301.1 D301.6 S201. S202. S203. S204. S205. S206. S207. S208. S209. S210. S211. S212. S213. S214. S215. S216. S217. S218. S219. S220. S221. S222. S223. S224. S225. S226. S227. S228. S229. S230. S231. S232. S233. S234. S235. S236. S237. S238. S239. S240. S241. S242. S243. S244. S245. S246. S247. S248. S249. S250. S251. S252. S253. S254. S256. S257. S258. S259. S260. S262. S264. S265. S266. S267. S268. S269. S270.
copper on no net: | length 117.9
  Component Side w0.254: -143.764,16.637 -121.031,16.637 -121.031,23.368 -143.764,23.368 -143.764,16.637
  Bottom Layer w0.254: -143.764,16.637 -143.764,23.368 -121.031,23.368 -121.031,16.637 -143.764,16.637

## Polygon pours and split planes (outlines as drawn)
GND on Component Side "Component Side-GND" (hatched 45Degree grid 0.508 track 0.203, remove dead copper, pour order 0): -35.687,76.708 ccw(c-34.417,76.708) -34.417,75.438 -16.51,75.438 cw(c-16.51,72.372) -14.342,74.54 -11.439,71.637 ccw(c-9.271,73.805) -9.271,70.739 -2.159,70.739 ccw(c-2.159,72.009) -0.889,72.009 -0.889,83.185 ccw(c-2.159,83.185) -2.159,84.455 -11.176,84.455 cw(c-11.176,85.725) -12.446,85.725 -12.446,93.091 ccw(c-13.716,93.091) -13.716,94.361 -22.606,94.361 ccw(c-22.606,93.091) -23.876,93.091 -23.876,89.916 cw(c-25.146,89.916) -25.146,88.646 -34.417,88.646 ccw(c-34.417,87.376) -35.687,87.376
GND on Bottom Layer "Bottom Layer-GND" (hatched 45Degree grid 0.508 track 0.203, remove dead copper, pour order 1): -35.687,76.708 ccw(c-34.417,76.708) -34.417,75.438 -16.51,75.438 cw(c-16.51,72.372) -14.342,74.54 -11.439,71.637 ccw(c-9.271,73.805) -9.271,70.739 -2.159,70.739 ccw(c-2.159,72.009) -0.889,72.009 -0.889,83.185 ccw(c-2.159,83.185) -2.159,84.455 -11.176,84.455 cw(c-11.176,85.725) -12.446,85.725 -12.446,93.091 ccw(c-13.716,93.091) -13.716,94.361 -22.606,94.361 ccw(c-22.606,93.091) -23.876,93.091 -23.876,89.916 cw(c-25.146,89.916) -25.146,88.646 -34.417,88.646 ccw(c-34.417,87.376) -35.687,87.376

## Other copper
Component Side:
  pour cut-out: -285.3,2.215 ccw(c-282.85,2.215) -282.85,-0.235 ccw(c-282.85,0.215) -282.848,-0.235 -275.85,-0.235 ccw(c-275.85,0.215) -275.411,0.114 cw(c-272.7,-0.52) -269.989,0.113 ccw(c-269.55,0.215) -269.1,0.215 ccw(c-269.55,0.215) -269.111,0.317 ccw(c-272.7,-0.52) -276.189,0.665 -282.85,0.665 ccw(c-282.85,0.215) -282.851,0.665 ccw(c-282.85,2.215) -282.85,0.665 -282.851,0.665 cw(c-282.85,2.215) -284.4,2.215 -284.4,36.126 -280.67,36.126 ccw(c-280.67,37.719) -279.077,37.719 -279.077,37.795 ccw(c-280.797,37.795) -280.797,39.515 -284.4,39.515 -284.4,92.415 ccw(c-284.85,92.415) -284.4,92.416 cw(c-282.85,92.415) -282.851,93.965 cw(c-282.85,92.415) -282.85,93.965 -276.189,93.965 ccw(c-272.7,95.149) -269.211,93.965 -189.389,93.965 ccw(c-185.9,95.149) -182.411,93.965 -102.589,93.965 ccw(c-99.1,95.149) -95.611,93.965 -13.816,93.965 ccw(c-10.327,95.149) -6.838,93.965 -2.15,93.965 cw(c-2.15,92.415) -0.6,92.415 -0.6,39.515 -4.242,39.515 ccw(c-4.242,37.846) -5.911,37.846 ccw(c-4.191,37.846) -4.191,36.126 -0.6,36.126 -0.6,2.215 cw(c-2.15,2.215) -2.15,0.665 -8.811,0.665 ccw(c-12.3,-0.52) -15.789,0.665 -95.611,0.665 ccw(c-99.1,-0.52) -102.589,0.665 -182.411,0.665 ccw(c-185.9,-0.52) -189.489,0.317 ccw(c-189.05,0.215) -188.611,0.113 cw(c-185.9,-0.52) -183.189,0.114 cw(c-185.9,-0.52) -183.189,0.113 -183.189,0.114 ccw(c-182.75,0.215) -182.75,-0.235 -102.25,-0.235 ccw(c-102.25,0.215) -101.811,0.115 cw(c-99.1,-0.52) -96.389,0.114 cw(c-99.1,-0.52) -96.389,0.113 -96.389,0.114 ccw(c-95.95,0.215) -95.95,-0.235 -15.45,-0.235 ccw(c-15.45,0.215) -15.011,0.114 cw(c-12.3,-0.52) -9.589,0.113 ccw(c-9.15,0.215) -9.15,-0.235 -2.15,-0.235 ccw(c-2.15,2.215) 0.3,2.215 0.3,36.576 ccw(c-0.15,36.576) -0.15,37.026 -4.191,37.026 cw(c-4.191,37.846) -5.011,37.846 cw(c-4.242,37.846) -4.242,38.615 -0.15,38.615 ccw(c-0.15,39.065) 0.3,39.065 0.3,92.415 ccw(c-2.15,92.415) -2.15,94.865 -7.15,94.865 ccw(c-7.15,94.415) -7.164,94.865 ccw(c-7.177,94.415) -7.616,94.517 cw(c-10.327,95.149) -13.038,94.516 cw(c-10.327,95.149) -13.038,94.517 -13.038,94.516 ccw(c-13.477,94.415) -13.477,94.865 -95.95,94.865 ccw(c-95.95,94.415) -96.389,94.517 cw(c-99.1,95.149) -101.811,94.516 cw(c-99.1,95.149) -101.811,94.517 -101.811,94.516 ccw(c-102.25,94.415) -102.25,94.865 -182.75,94.865 ccw(c-182.75,94.415) -183.189,94.516 ccw(c-185.9,95.149) -183.189,94.517 -183.189,94.516 cw(c-185.9,95.149) -188.611,94.517 ccw(c-189.05,94.415) -189.05,94.865 -269.55,94.865 ccw(c-269.55,94.415) -269.988,94.517 cw(c-272.7,95.149) -275.411,94.516 ccw(c-275.85,94.415) -275.85,94.865 -282.85,94.865 cw(c-282.85,94.415) -282.848,94.865 -282.85,94.865 ccw(c-282.85,92.415) -285.3,92.415 ccw(c-284.85,92.415) -285.3,92.413 -285.3,39.065 ccw(c-284.85,39.065) -284.85,38.615 -280.797,38.615 cw(c-280.797,37.795) -279.977,37.795 -279.977,37.719 cw(c-280.67,37.719) -280.67,37.026 -284.861,37.026 ccw(c-284.861,36.576) -285.3,36.477
  pour cut-out: -269.55,-0.235 cw(c-269.55,0.215) -269.55,0.665 -189.05,0.665 cw(c-189.05,0.215) -188.6,0.215 cw(c-189.05,0.215) -189.05,-0.235
  pour cut-out: -13.837,94.342 ccw(c-10.3,95.149) -6.754,94.388 ccw(c-6.878,94.415) -6.751,94.415 ccw(c-6.878,94.415) -6.878,94.542 -13.668,94.542 ccw(c-13.668,94.415) -13.777,94.48 ccw(c-13.713,94.37)
  text "BOOTLEG-1" at -142.748,19.812 h5
  text "Rev B1" at -142.621,17.653 h2
  text "by 4pplet" at -130.175,17.653 h2
Bottom Layer:
  pour cut-out: -269.55,-0.235 cw(c-269.55,0.215) -269.55,0.665 -189.05,0.665 cw(c-189.05,0.215) -188.6,0.215 cw(c-189.05,0.215) -189.05,-0.235
  pour cut-out: -285.3,2.215 ccw(c-282.85,2.215) -282.85,-0.235 ccw(c-282.85,0.215) -282.848,-0.235 -275.85,-0.235 ccw(c-275.85,0.215) -275.411,0.114 cw(c-272.7,-0.52) -269.989,0.113 ccw(c-269.55,0.215) -269.1,0.215 ccw(c-269.55,0.215) -269.111,0.317 ccw(c-272.7,-0.52) -276.189,0.665 -282.85,0.665 ccw(c-282.85,0.215) -282.851,0.665 ccw(c-282.85,2.215) -282.85,0.665 -282.851,0.665 cw(c-282.85,2.215) -284.4,2.215 -284.4,36.126 -280.67,36.126 ccw(c-280.67,37.719) -279.077,37.719 -279.077,37.795 ccw(c-280.797,37.795) -280.797,39.515 -284.4,39.515 -284.4,92.415 ccw(c-284.85,92.415) -284.4,92.416 cw(c-282.85,92.415) -282.851,93.965 cw(c-282.85,92.415) -282.85,93.965 -276.189,93.965 ccw(c-272.7,95.149) -269.211,93.965 -189.389,93.965 ccw(c-185.9,95.149) -182.411,93.965 -102.589,93.965 ccw(c-99.1,95.149) -95.611,93.965 -13.816,93.965 ccw(c-10.327,95.149) -6.838,93.965 -2.15,93.965 cw(c-2.15,92.415) -0.6,92.415 -0.6,39.515 -4.242,39.515 ccw(c-4.242,37.846) -5.911,37.846 ccw(c-4.191,37.846) -4.191,36.126 -0.6,36.126 -0.6,2.215 cw(c-2.15,2.215) -2.15,0.665 -8.811,0.665 ccw(c-12.3,-0.52) -15.789,0.665 -95.611,0.665 ccw(c-99.1,-0.52) -102.589,0.665 -182.411,0.665 ccw(c-185.9,-0.52) -189.489,0.317 ccw(c-189.05,0.215) -188.611,0.113 cw(c-185.9,-0.52) -183.189,0.114 cw(c-185.9,-0.52) -183.189,0.113 -183.189,0.114 ccw(c-182.75,0.215) -182.75,-0.235 -102.25,-0.235 ccw(c-102.25,0.215) -101.811,0.115 cw(c-99.1,-0.52) -96.389,0.114 cw(c-99.1,-0.52) -96.389,0.113 -96.389,0.114 ccw(c-95.95,0.215) -95.95,-0.235 -15.45,-0.235 ccw(c-15.45,0.215) -15.011,0.114 cw(c-12.3,-0.52) -9.589,0.113 ccw(c-9.15,0.215) -9.15,-0.235 -2.15,-0.235 ccw(c-2.15,2.215) 0.3,2.215 0.3,36.576 ccw(c-0.15,36.576) -0.15,37.026 -4.191,37.026 cw(c-4.191,37.846) -5.011,37.846 cw(c-4.242,37.846) -4.242,38.615 -0.15,38.615 ccw(c-0.15,39.065) 0.3,39.065 0.3,92.415 ccw(c-2.15,92.415) -2.15,94.865 -7.15,94.865 ccw(c-7.15,94.415) -7.164,94.865 ccw(c-7.177,94.415) -7.616,94.517 cw(c-10.327,95.149) -13.038,94.516 cw(c-10.327,95.149) -13.038,94.517 -13.038,94.516 ccw(c-13.477,94.415) -13.477,94.865 -95.95,94.865 ccw(c-95.95,94.415) -96.389,94.517 cw(c-99.1,95.149) -101.811,94.516 cw(c-99.1,95.149) -101.811,94.517 -101.811,94.516 ccw(c-102.25,94.415) -102.25,94.865 -182.75,94.865 ccw(c-182.75,94.415) -183.189,94.516 ccw(c-185.9,95.149) -183.189,94.517 -183.189,94.516 cw(c-185.9,95.149) -188.611,94.517 ccw(c-189.05,94.415) -189.05,94.865 -269.55,94.865 ccw(c-269.55,94.415) -269.988,94.517 cw(c-272.7,95.149) -275.411,94.516 ccw(c-275.85,94.415) -275.85,94.865 -282.85,94.865 cw(c-282.85,94.415) -282.848,94.865 -282.85,94.865 ccw(c-282.85,92.415) -285.3,92.415 ccw(c-284.85,92.415) -285.3,92.413 -285.3,39.065 ccw(c-284.85,39.065) -284.85,38.615 -280.797,38.615 cw(c-280.797,37.795) -279.977,37.795 -279.977,37.719 cw(c-280.67,37.719) -280.67,37.026 -284.861,37.026 ccw(c-284.861,36.576) -285.3,36.477
  pour cut-out: -13.837,94.342 ccw(c-10.3,95.149) -6.754,94.388 ccw(c-6.878,94.415) -6.751,94.415 ccw(c-6.878,94.415) -6.878,94.542 -13.668,94.542 ccw(c-13.668,94.415) -13.777,94.48 ccw(c-13.713,94.37)
  text "BOOTLEG-1" at -121.793,19.812 h5
  text "Rev B1" at -137.287,17.653 h2
  text "by 4pplet" at -121.92,17.653 h2

## Silkscreen, mask and mechanical layers (free items; w line width, h text height)
Top Overlay:
  text "RESET" at -6.985,67.818 h2
outline:
  lines w0.1: -284.85,39.065 -284.85,92.415 cw(c-282.85,92.415) -282.85,94.415 -275.85,94.415 ccw(c-272.7,95.149) -269.55,94.415 -189.05,94.415 ccw(c-185.9,95.149) -182.75,94.415 -102.25,94.415 ccw(c-99.1,95.149) -95.95,94.415 -23.553,94.415 ; -284.85,40.767 -284.85,2.215 ccw(c-282.85,2.215) -282.85,0.215 -275.85,0.215 cw(c-272.7,-0.52) -269.55,0.215 -189.05,0.215 cw(c-185.9,-0.52) -182.75,0.215 -102.25,0.215 cw(c-99.1,-0.52) -95.95,0.215 -15.45,0.215 cw(c-12.3,-0.52) -9.15,0.215 -2.15,0.215 ccw(c-2.15,2.215) -0.15,2.215 -0.15,39.37 ; -24.208,94.415 -13.477,94.415 ccw(c-10.327,95.149) -7.177,94.415 ; -7.15,94.415 -2.15,94.415 cw(c-2.15,92.415) -0.15,92.415 -0.15,39.065
Mechanical 2:
  lines w0.254: -35.687,76.708 ccw(c-34.417,76.708) -34.417,75.438 -16.51,75.438 cw(c-16.51,72.372) -14.342,74.54 -11.439,71.637 ccw(c-9.271,73.805) -9.271,70.739 -3.048,70.739 -2.159,70.739 ccw(c-2.159,72.009) -0.889,72.009 -0.889,83.185 ccw(c-2.159,83.185) -2.159,84.455 -5.969,84.455 -11.176,84.455 cw(c-11.176,85.725) -12.446,85.725 -12.446,93.091 ccw(c-13.716,93.091) -13.716,94.361 -22.606,94.361 ccw(c-22.606,93.091) -23.876,93.091 -23.876,89.916 cw(c-25.146,89.916) -25.146,88.646 -29.464,88.646 -34.417,88.646 ccw(c-34.417,87.376) -35.687,87.376 -35.687,76.708
Mechanical 16:
  drawing of 560 lines, arcs and shapes, not listed

## Dimensions
-0.15,92.415 to -284.85,92.415 on top dimensions
-9.15,0.215 to -7.177,94.415 on top dimensions
-0.15,92.415 to -284.85,92.415 on bot dimensions
-9.15,0.215 to -2.15,94.415 on bot dimensions

## Text inside footprints (layer, text, board x,y; h text height)
CON301: Mechanical 15 "connector edge" at -15.25,95.25 h1 r180
S262: Mechanical 16 "7U" at -208.331,7.365 h1.52 r270; Mechanical 16 "6.25U" at -188.764,5.615 h1.52 r270